# EAGLE board SOIC16 breakout (EAGLE 8.4.1)
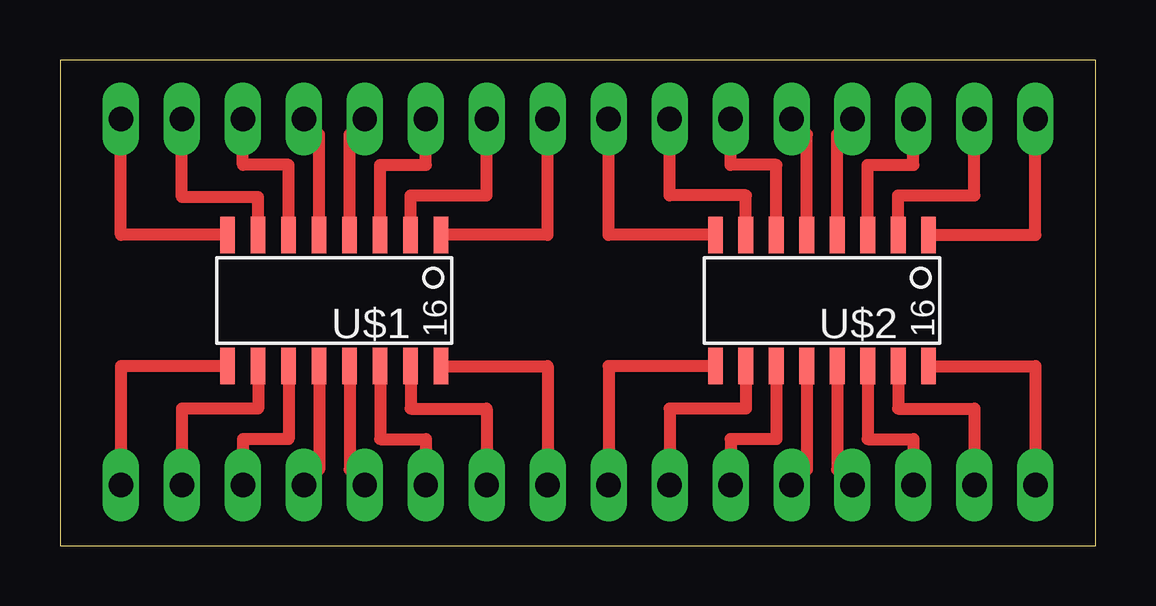
[diagram p0: board, top side]
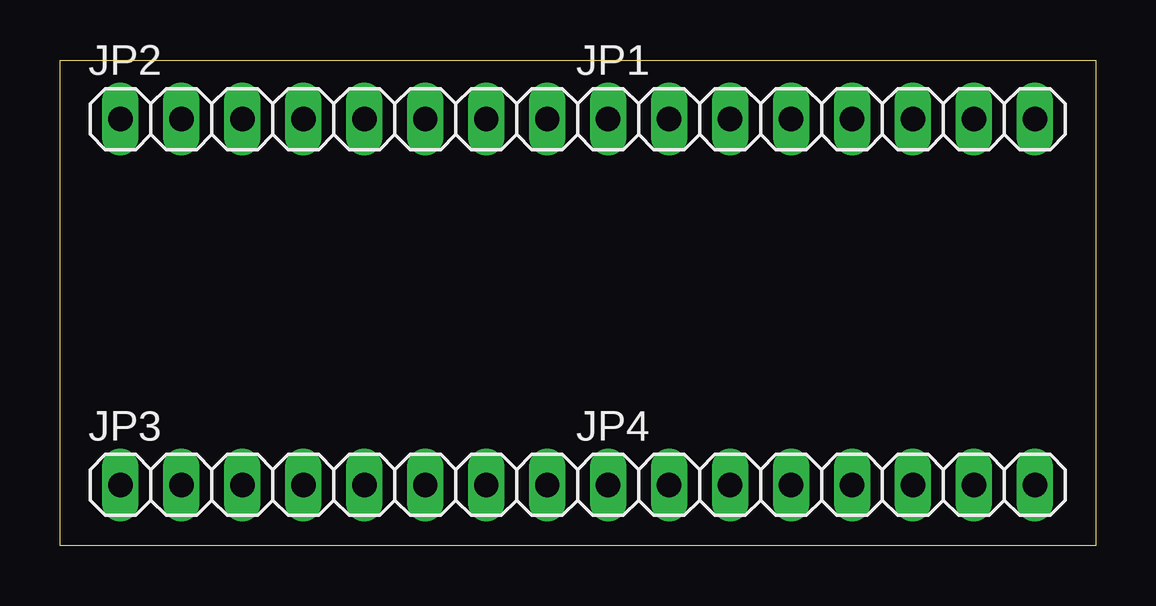
[diagram p1: board, bottom side, seen from below]

Size 43.16 x 20.24 mm. Coordinates in mm from the lower left corner, seen from the top.
Outline: 0,0 43.16,0 43.16,20.24 0,20.24 0,0
Copper layers (1*16): Top 0.035mm / dielectric 1.5mm / Bottom 0.035mm
Design rules "default": minimum track width 10mil, minimum drill 24mil, track to track 8mil, track to pad 8mil, pad to pad 8mil, via to via 8mil, smd to smd 8mil, copper to edge 40mil, drill to drill 8mil, minimum pad ring 10mil, minimum via ring 8mil, stop-mask expansion 4mil, vias tented up to drill 0mil, thermal gap 10mil

## Footprints (pad centres in the part's own frame; a part is rotated, then mirrored left to right if it is on the bottom)
1X08 = drill 1.016 long: 1 -8.89,0; 2 -6.35,0; 3 -3.81,0; 4 -1.27,0; 5 1.27,0; 6 3.81,0; 7 6.35,0; 8 8.89,0
SOIC-16 = smd 0.61 x 1.524: 1 -4.445,-2.794; 2 -3.175,-2.794; 3 -1.905,-2.794; 4 -0.635,-2.794; 5 0.635,-2.794; 6 1.905,-2.794; 7 3.175,-2.794; 8 4.445,-2.794; 9 4.445,2.667; 10 3.175,2.667; 11 1.905,2.667; 12 0.635,2.667; 13 -0.635,2.667; 14 -1.905,2.667; 15 -3.175,2.667; 16 -4.445,2.667

## Placement (x,y rotation side)
JP1  [1X08]  11.43,17.78 0 bottom
JP2  [1X08]  31.75,17.78 0 bottom
JP3  [1X08]  31.75,2.54 0 bottom
JP4  [1X08]  11.43,2.54 0 bottom
U$1  SOIC16  [SOIC-16]  11.43,10.16 180 top
U$2  SOIC16  [SOIC-16]  31.75,10.16 180 top

## Library data of the parts
JP1-JP4 U$1 U$2 = HyTechDevices

## Nets
N$1: JP1.1 U$1.1
N$2: JP1.2 U$1.2
N$3: JP1.3 U$1.3
N$4: JP1.4 U$1.4
N$5: JP1.5 U$1.5
N$6: JP1.6 U$1.6
N$7: JP1.7 U$1.7
N$8: JP1.8 U$1.8
N$9: JP2.1 U$2.1
N$10: JP2.2 U$2.2
N$11: JP2.3 U$2.3
N$12: JP2.4 U$2.4
N$13: JP2.5 U$2.5
N$14: JP2.6 U$2.6
N$15: JP2.7 U$2.7
N$16: JP2.8 U$2.8
N$17: JP3.1 U$2.16
N$18: JP3.2 U$2.15
N$19: JP3.3 U$2.14
N$20: JP3.4 U$2.13
N$21: JP3.5 U$2.12
N$22: JP3.6 U$2.11
N$23: JP3.7 U$2.10
N$24: JP3.8 U$2.9
N$25: JP4.1 U$1.16
N$26: JP4.2 U$1.15
N$27: JP4.3 U$1.14
N$28: JP4.4 U$1.13
N$29: JP4.5 U$1.12
N$30: JP4.6 U$1.11
N$31: JP4.7 U$1.10
N$32: JP4.8 U$1.9

## Tracks (layer width: path | path; a pad name or v marks a point on that pad's centre or on a via)
N$1
  Top 0.508: U$1.1 20.32,12.95 JP1.1
N$2
  Top 0.508: U$1.2 14.61,14.61 17.78,14.61 JP1.2
N$3
  Top 0.508: U$1.3 13.34,15.88 15.24,15.88 JP1.3
N$4
  Top 0.508: U$1.4 12.07,17.14 12.7,17.14 JP1.4
N$5
  Top 0.508: U$1.5 10.8,17.14 10.16,17.14 JP1.5
N$6
  Top 0.508: U$1.6 9.52,15.88 7.62,15.88 JP1.6
N$7
  Top 0.508: U$1.7 8.25,14.53 5.08,14.53 JP1.7
N$8
  Top 0.508: U$1.8 2.54,12.95 JP1.8
N$9
  Top 0.508: U$2.1 40.64,12.95 JP2.1
N$10
  Top 0.508: U$2.2 34.93,14.61 38.1,14.61 JP2.2
N$11
  Top 0.508: U$2.3 33.66,15.88 35.56,15.88 JP2.3
N$12
  Top 0.508: U$2.4 32.38,17.14 33.02,17.14 JP2.4
N$13
  Top 0.508: U$2.5 31.12,17.14 30.48,17.14 JP2.5
N$14
  Top 0.508: U$2.6 29.84,15.88 27.94,15.88 JP2.6
N$15
  Top 0.508: U$2.7 28.57,14.61 25.4,14.61 JP2.7
N$16
  Top 0.508: U$2.8 22.86,12.95 JP2.8
N$17
  Top 0.508: U$2.16 40.64,7.49 JP3.1
N$18
  Top 0.508: U$2.15 34.93,5.71 38.1,5.71 JP3.2
N$19
  Top 0.508: U$2.14 33.66,4.45 35.56,4.45 JP3.3
N$20
  Top 0.508: U$2.13 32.38,3.17 33.02,3.17 JP3.4
N$21
  Top 0.508: U$2.12 31.12,3.17 30.48,3.17 JP3.5
N$22
  Top 0.508: U$2.11 29.84,4.45 27.94,4.45 JP3.6
N$23
  Top 0.508: U$2.10 28.57,5.71 25.4,5.71 JP3.7
N$24
  Top 0.508: U$2.9 22.86,7.49 JP3.8
N$25
  Top 0.508: U$1.16 20.32,7.49 JP4.1
N$26
  Top 0.508: U$1.15 14.61,5.71 17.78,5.71 JP4.2
N$27
  Top 0.508: U$1.14 13.34,4.45 15.24,4.45 JP4.3
N$28
  Top 0.508: U$1.13 12.07,3.17 12.7,3.17 JP4.4
N$29
  Top 0.508: U$1.12 10.8,3.17 10.16,3.17 JP4.5
N$30
  Top 0.508: U$1.11 9.52,4.45 7.62,4.45 JP4.6
N$31
  Top 0.508: U$1.10 8.25,5.71 5.08,5.71 JP4.7
N$32
  Top 0.508: U$1.9 2.54,7.49 JP4.8

## Text on the board
tDocu: HyTech Racing